# EAGLE board Epic Wluff (EAGLE 9.7.0)

Size 276.21 x 264.95 mm. Coordinates in mm from the lower left corner, seen from the top.
Outline: 0,0 276.21,0 276.21,264.95 0,264.95 0,0
Copper layers (1*16): Top 0.035mm / dielectric 1.5mm / Bottom 0.035mm
Design rules "default": minimum track width 6mil, minimum drill 0.35mm, track to track 6mil, track to pad 6mil, pad to pad 6mil, via to via 6mil, smd to smd 6mil, copper to edge 40mil, drill to drill 6mil, minimum pad ring 10mil, minimum via ring 8mil, stop-mask expansion 4mil, vias tented up to drill 0mil, thermal gap 10mil

## Placement (x,y rotation side)
D1  RED  [LEDRD254W60D565H860B]  191.57,257.04 180 top
DIST1  DISTANCE-SENSOR-4PINHC-SR04  [HC-SR04]  60.47,22.23 0 top
M1  MOTOR_HDR  [MOTOR]  246.54,249.34 0 top
PIEZO1  PIEZO  [PIEZO]  11.73,49.59 180 top
PIR1  PIR-SENSOR_28027  [28027]  190.9,42.18 180 top
R1  100  [RESAD1016W63L850D250B]  197.07,241.28 90 top
SERVO1  SERVOSG90  [SG90]  238.97,73.42 0 top
U1  ARDUINO-UNO-R3-SHIELD  [ARDUINO-UNO-R3-SHIELD]  127.22,155.93 270 top
U2  TMP36GT9Z_TO92  [TO92]  270.12,225.37 0 top

## Library data of the parts
D1 = Tinkercad; CATEGORY: Opto-Electronic; SUB-CATEGORY: LED; VALUE: LED_RED
DIST1 M1 PIEZO1 PIR1 R1 SERVO1 U1 U2 = Tinkercad

## Nets
D1_A: D1.1 R1.2
U1_5V: DIST1.1 PIR1.2 SERVO1.2 U1.5V U2.3
U1_A0: U1.A0 U2.2
U1_D5: SERVO1.3 U1.D5
U1_D6: DIST1.2 U1.D6
U1_D7: DIST1.3 U1.D7
U1_D10: M1.+ U1.D10
U1_D11: PIEZO1.1 U1.D11
U1_D12: PIR1.1 U1.D12
U1_D13: R1.1 U1.D13
U1_GND: D1.2 DIST1.4 M1.- PIEZO1.2 PIR1.3 SERVO1.1 U1.GND@0 U1.GND@1 U1.GND@2 U2.1

## Tracks (layer width: path | path; a pad name or v marks a point on that pad's centre or on a via)
D1_A  (1 unrouted)
U1_5V  (4 unrouted)
U1_A0  (1 unrouted)
U1_D5  (1 unrouted)
U1_D6  (1 unrouted)
U1_D7  (1 unrouted)
U1_D10  (1 unrouted)
U1_D11  (1 unrouted)
U1_D12  (1 unrouted)
U1_D13  (1 unrouted)
U1_GND  (9 unrouted)